# Altium PCB PCB_s01.PcbDoc (part 2 of 2)
Units mm, origin at the board's own origin, x right, y up, seen from the top; angles counter-clockwise.
Board outline 127 x 56.01 mm, 2 copper layers (Top Layer, Bottom Layer); 73 components, 51 nets, 213 pads, 570 vias.
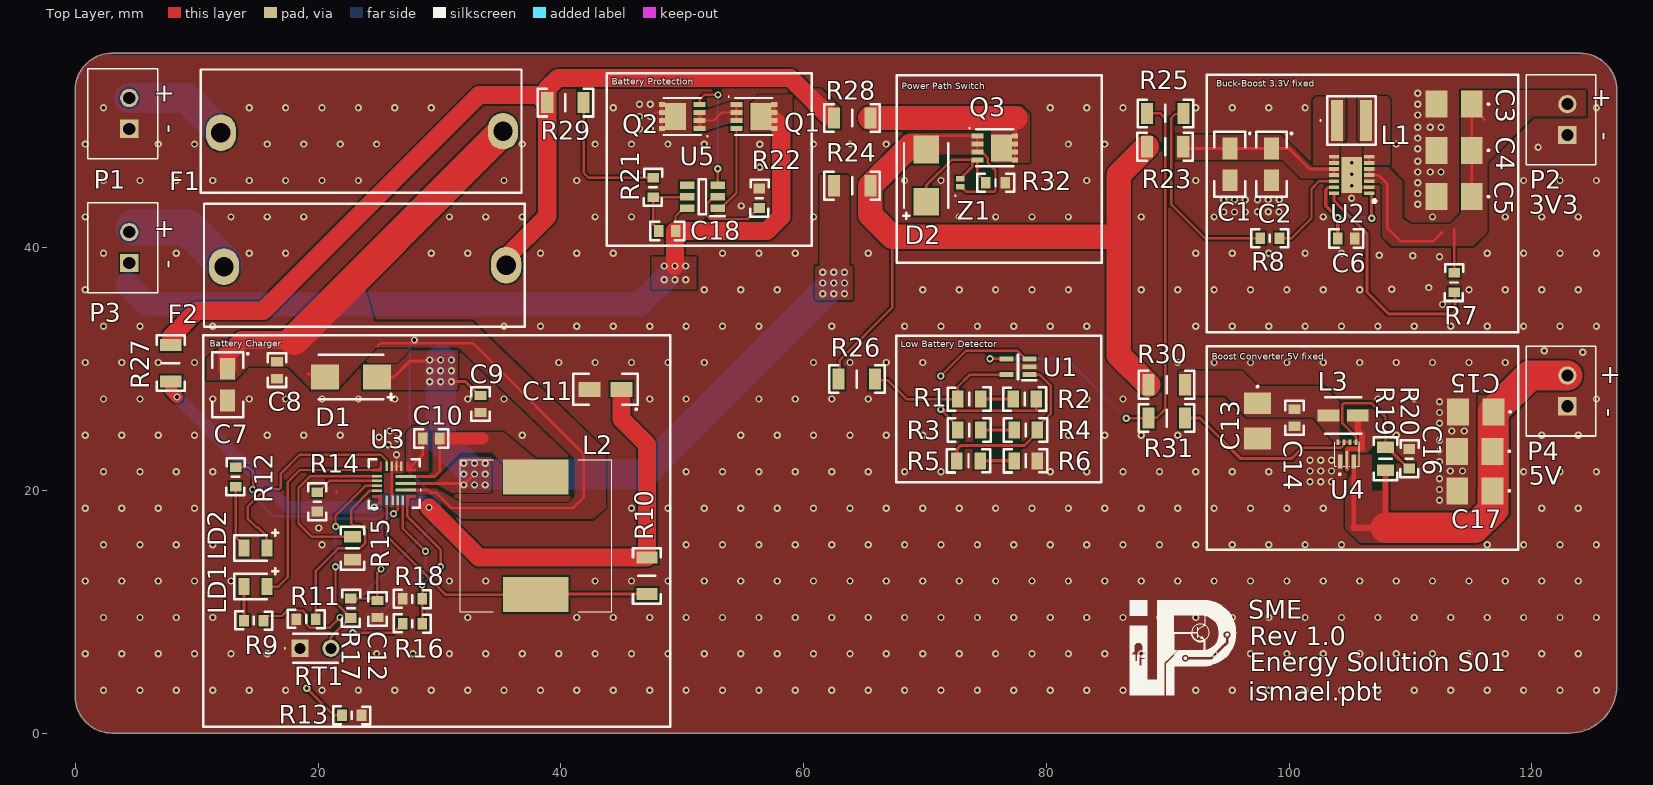
[diagram p0: Top Layer view]

## Polygon pours and split planes (outlines as drawn) (continued)
NetC3_1 on Top Layer "NONET_L-01_P-001" (solid, pour order 45): 106.18,45.312 106.18,46.634 108.179,46.634 109.347,45.466 109.347,42.418 110.078,41.91 113.284,41.91 114.156,42.782 116.332,42.782 116.332,41.275 115.189,40.132 108.458,40.132 107.696,40.894 107.696,45.101 107.476,45.321
NetC1_1 on Top Layer "NONET_L-01_P-001" (solid, pour order 39): 104.129,45.819 104.129,46.625 103.267,46.625 101.965,46.625 99.314,49.276 90.678,49.276 90.678,47.244 99.441,47.244 100.965,45.72 104.123,45.72 104.126,45.723
NetL1_1 on Top Layer "NONET_L-01_P-001" (solid, pour order 43): 104.139,46.833 104.139,48.357 104.647,48.865 104.647,52.421 102.234,52.421 101.98,52.167 101.98,46.833 101.98,46.788 104.139,46.788 104.139,46.792
NetL1_2 on Top Layer "NONET_L-01_P-001" (solid, pour order 42): 106.172,46.863 106.172,48.387 105.664,48.895 105.664,52.451 108.077,52.451 108.331,52.197 108.331,46.863 108.331,46.818 106.172,46.818 106.172,46.822
GND on Top Layer "NONET_L-01_P-001" (solid, pour order 41): 113.157,42.926 113.157,53.086 109.982,53.086 109.982,42.926
GND on Top Layer "NONET_L-01_P-001" (solid, pour order 40): 93.98,46.609 99.695,46.609 99.695,42.418 99.568,42.545 93.98,42.545
NetL3_2 on Top Layer "NONET_L-01_P-001" (solid, pour order 38): 104.777,26.658 104.789,26.67 106.934,26.67 107.696,25.908 107.696,24.384 106.401,23.089 105.792,23.089 105.792,24.51 104.775,25.527 104.775,26.67
GND on Top Layer "NONET_L-01_P-001" (solid, pour order 34): 114.808,18.796 114.808,27.686 111.887,27.686 111.887,23.042 111.887,18.796
NetC13_1 on Top Layer "NONET_L-01_P-001" (solid, pour order 37): 90.932,27.813 94.742,27.813 96.52,26.035 101.981,26.035 103.905,23.749 104.159,23.749 104.159,27.286 102.87,28.575 97.409,28.575 96.139,29.845 90.932,29.845
GND on Top Layer "NONET_L-01_P-001" (solid, pour order 36): 104.399,22.914 104.399,20.452 104.013,20.066 101.6,20.066 101.092,20.574 101.092,22.606 101.473,22.987 104.394,22.987 104.394,22.86
NetC15_1 on Top Layer "NONET_L-01_P-001" (solid, pour order 35): 105.161,22.935 106.807,22.935 106.807,19.947 108.183,19.947 108.183,15.664 105.875,15.664 104.648,16.891 104.648,19.431 104.902,19.685 104.902,21.082 105.156,21.336 105.156,22.86
NetC15_1 on Top Layer "NONET_L-01_P-001" (solid, pour order 33): 115.57,27.813 118.11,27.813 118.11,17.967 117.005,16.861 115.57,18.296
NetD2_1 on Top Layer "NONET_L-01_P-001" (solid, pour order 32): 74.803,49.403 74.828,49.378 74.828,47.672 70.913,47.672 70.866,47.625 70.025,48.466 69.06,49.226 70.104,49.403
NetQ3_3 on Top Layer "NONET_L-01_P-001" (solid, pour order 31): 75.494,47.095 75.467,47.122 75.467,51.658 77.956,51.658 78.625,50.989 78.625,50.882 78.625,46.988 75.567,46.988 75.438,47.117
NetC9_2 on Top Layer "NONET_L-01_P-001" (solid, pour order 28): 61.341,45.974 63.754,45.974 63.751,38.48 64.037,38.48 64.037,35.687 60.958,35.687 60.965,38.481 61.341,38.481
NetC9_2 on Top Layer "NONET_L-01_P-001" (solid, pour order 8): 29.734,20.702 31.765,22.733 34.29,22.733 34.29,19.939 34.163,19.812 30.988,19.812 29.856,20.452 29.822,20.522
NetC9_2 on Top Layer "NONET_L-01_P-001" (solid, pour order 24): 25.992,30.376 26.566,30.376 27.686,31.496 31.496,31.496 31.496,28.291 25.992,28.291
NetF2_2 on Top Layer "NONET_L-01_P-001" (solid, pour order 23): 62.992,51.562 61.468,53.086 60.325,53.086 60.325,51.513 62.036,49.802 62.992,50.759
NetC18_1 on Top Layer "NONET_L-01_P-001" (solid, pour order 22): 55.648,51.901 56.326,52.578 59.055,52.578 59.055,49.911 58.547,49.403 58.42,49.53 55.626,49.53 55.626,51.943
NetC18_1 on Top Layer "NONET_L-01_P-001" (solid, pour order 21): 47.498,39.243 51.181,39.243 51.181,36.576 47.498,36.576
GND on Top Layer "NONET_L-01_P-001" (solid, pour order 18): 50.284,51.917 49.751,52.451 46.482,52.451 45.72,51.689 45.72,49.911 46.609,49.022 49.631,49.022 50.295,49.686 50.292,49.689 50.292,51.943
NetQ1_1 on Top Layer "NONET_L-01_P-001" (solid, pour order 17): 50.96,51.334 51.951,51.329 53.982,51.995 54.976,51.99 54.982,51.995 54.976,50.265 54.006,50.265 51.951,49.609 50.955,49.599 50.95,49.604 50.955,49.609 50.955,51.329
GND on Top Layer "NONET_L-01_P-001" (solid, pour order 12): 25.962,21.561 26.958,21.561 26.967,21.57 26.967,24.722 26.289,25.4 25.146,25.4 24.384,24.638 24.384,24.384 25.962,22.806 25.962,21.556
NetC10_1 on Top Layer "NONET_L-01_P-001" (solid, pour order 9): 29.067,21.22 29.094,21.22 29.464,21.59 29.464,24.765 32.312,24.765 35.291,24.765 38.053,22.479 35.718,21.67 34.3,23.116 31.75,23.112 31.117,22.479 29.661,21.024 29.655,21.03 29.067,21.03 29.067,21.193 29.083,21.209
NetC7_1 on Top Layer "NONET_L-01_P-001" (solid, pour order 3): 13.16,29.1 14.286,30.226 17.526,30.226 19.431,28.321 21.596,28.321 24.812,31.778 32.995,31.778 31.543,31.778 41.155,22.606 41.155,19.457 40.622,18.923 31.877,18.923 29.752,20.143 28.058,20.143 28.058,19.9 28.273,19.685 29.337,19.685 31.877,17.653 42.672,17.653 43.688,18.542 43.688,23.292 32.713,33.909 24.638,33.909 23.749,37.084 18.542,32.639 18.415,32.766 13.589,32.766 13.208,32.893 10.822,30.874 10.822,29.083 13.208,29.083
NetC10_2 on Top Layer "NONET_L-01_P-001" (solid, pour order 4): 27.273,21.575 29.083,21.575 29.083,25.019 28.829,25.273 27.813,25.273 27.273,24.733 27.273,21.587 27.285,21.575
GND on Bottom Layer "NONET_L-01_P-001" (solid, pour order 49): 0.006,3.001 0,53.007 0.001,53.007 cw(c3.001,53.007) 3.001,56.007 124,56.007 124,56.008 cw(c124,53.008) 127,53.008 127,3.902 cw(c123.098,3.902) 123.098,0 3.006,0 3.006,0.001 cw(c3.006,3.001)
NetC9_2 on Bottom Layer "NONET_L-01_P-001" (solid, pour order 27): 64.008,38.735 64.008,35.56 61.087,35.56 61.087,38.735
NetC18_1 on Bottom Layer "NONET_L-01_P-001" (solid, pour order 26): 3.302,39.624 5.842,39.624 5.842,36.703 3.354,36.703 3.303,36.702 3.302,36.741
NetC9_2 on Bottom Layer "NONET_L-01_P-001" (solid, pour order 25): 34.417,22.987 34.417,19.812 31.496,19.812 31.496,22.987
NetC9_2 on Bottom Layer "NONET_L-01_P-001" (solid, pour order 20): 28.702,31.496 31.496,31.496 31.496,28.194 28.702,28.194
NetC18_1 on Bottom Layer "NONET_L-01_P-001" (solid, pour order 0): 51.181,39.243 51.181,36.576 47.498,36.576 47.498,39.243

## Silkscreen, mask and mechanical layers (free items; w line width, h text height)
Top Overlay:
  drawing of 28 lines, arcs and shapes, not listed
  text "Battery Protection" at 44.195,53.413 h0.53
  text "+" at 8.255,53.34 h1.52 r180
  text "Buck-Boost 3.3V fixed" at 94.003,53.236 h0.53
  text "Power Path Switch" at 68.095,53.063 h0.53
  text "+" at 126.619,52.959 h1.52 r180
  text "-" at 7.112,50.165 h1.52 r270
  text "-" at 125.349,49.53 h1.52 r270
  text "3V3" at 119.761,42.799 h1.52
  text "+" at 8.255,42.164 h1.52 r180
  text "-" at 7.112,38.989 h1.52 r270
  text "Battery Charger" at 11.072,31.823 h0.53
  text "Low Battery Detector" at 68.029,31.777 h0.53
  text "Boost Converter 5V fixed" at 93.622,30.757 h0.53
  text "+" at 125.603,28.829 h1.52
  text "-" at 126.873,26.035 h1.52 r90
  text "5V" at 119.761,20.447 h1.52
  text "SME" at 96.647,9.398 h1.52
  text "Rev 1.0" at 96.774,7.239 h1.52
  text "Energy Solution S01" at 96.774,5.08 h1.52
  text "ismael.pbt" at 96.629,2.667 h1.52
Board Shape:
  lines w0.207: 0,3.001 0,53.007 ; 0.001,53.007 cw(c3.001,53.007) 3.001,56.007 124,56.007 ; 0.006,3.001 ccw(c3.006,3.001) 3.006,0.001 ; 3.006,0 123.098,0 ccw(c123.098,3.902) 127,3.902 127,53.008 ccw(c124,53.008) 124,56.008

## Dimensions
0,56.007 to 127,56.007 on Dimensions
0,56.007 to 0,0 on Dimensions